# Altium PCB ResistorPatch1.PcbDoc
Units mm, origin at the board's own origin, x right, y up, seen from the top; angles counter-clockwise.
Board outline 99.31 x 19.43 mm, 2 copper layers (Top Layer, Bottom Layer); 43 components, 78 nets, 156 pads, 0 vias.
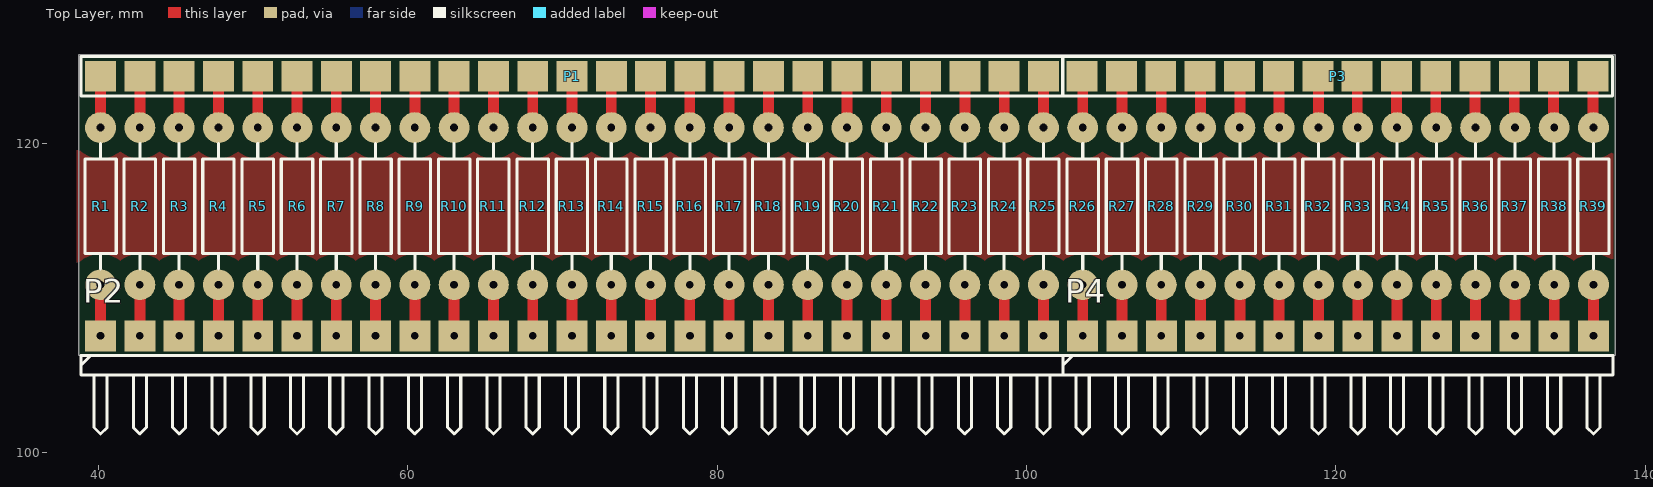
[diagram p0: Top Layer view]
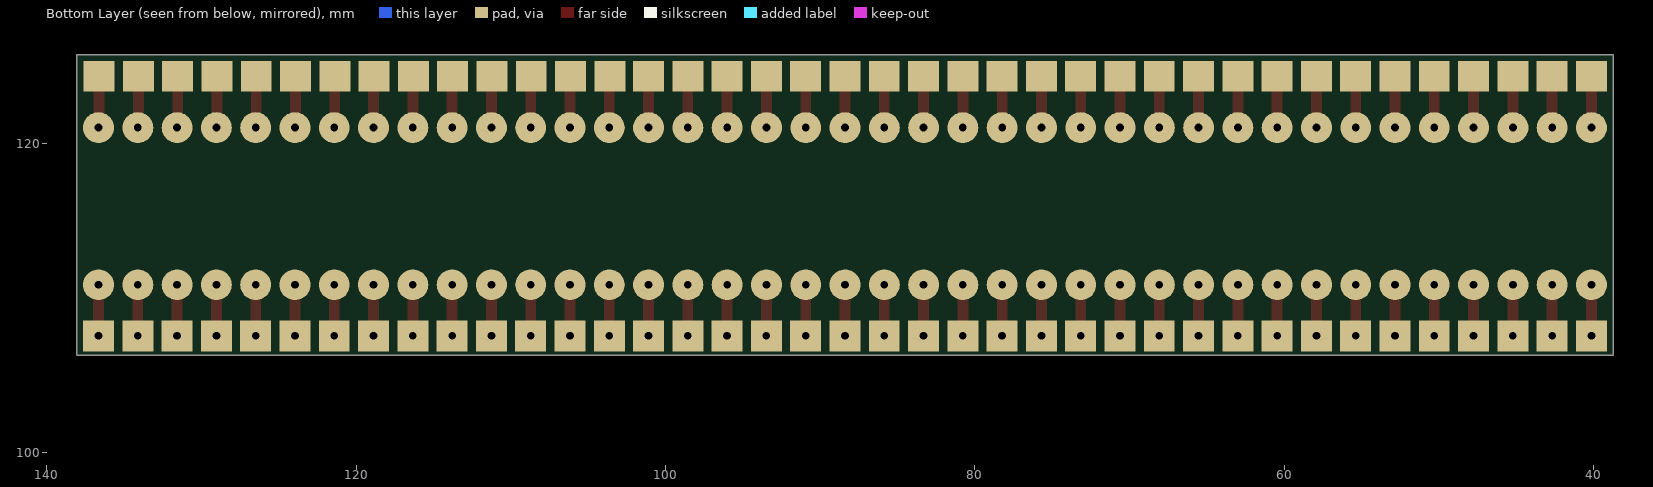
[diagram p1: Bottom Layer view, seen from below]

## Layer stack, top to bottom
Top Solder: solder mask 0.0102, Solder Resist, Dk 3.5
Top Layer: signal copper 0.0356
Dielectric 1: dielectric 0.32, FR-4, Dk 4.8
Bottom Layer: signal copper 0.0356
Bottom Solder: solder mask 0.0102, Solder Resist, Dk 3.5

## Board outline
38.735,106.299 138.049,106.299 138.049,125.73 38.735,125.73

## Design rules (kind name [scope] priority, off if disabled: settings)
Clearance Clearance_1 [InPolygon] p1: gap=1 ignorepadtopadclearanceinfootprint=FALSE
Clearance [All] p2: gap=0.254 ignorepadtopadclearanceinfootprint=FALSE except(0: Arc-Hole Track-Hole SMDPad-Hole THPad-Hole Via-Hole Fill-Hole Poly-Hole Region-Hole Text-Hole)
PolygonConnect [All] p1: connectstyle=Relief reliefconductorwidth=0.254 reliefentries=4 polygonreliefangle="90 Angle" airgapwidth=0.254
RoutingVias [All] p1: holewidth=0.711 width=1.27 viastyle="Through Hole" minholewidth=0.711 minwidth=1.27 maxholewidth=0.711 maxwidth=1.27
SolderMaskExpansion [All] p1: expansion=0.102
Width [All] p1: maxlimit=5 minlimit=0.254 preferedwidth=0.254
30 further rules are at their usual default settings.

## Components (designator, comment, footprint, x,y, rotation, side; value= is the part's Value field where it differs from the comment)
P1 "Header 25" HDR1X25 40.136,124.35 r0 top locked
P2 "Header 25" HDR1X25H 40.136,107.569 r0 top
P3 "Header 14" HDR1X14 103.596,124.35 r0 top locked
P4 "Header 14" HDR1X14H 103.632,107.569 r0 top
R1 "Res1" AXIAL-0.4 40.136,115.951 r270 top value=1k
R2 "Res1" AXIAL-0.4 42.676,115.951 r270 top value=1k
R3 "Res1" AXIAL-0.4 45.212,115.951 r270 top value=1k
R4 "Res1" AXIAL-0.4 47.756,115.951 r270 top value=1k
R5 "Res1" AXIAL-0.4 50.296,115.951 r270 top value=1k
R6 "Res1" AXIAL-0.4 52.836,115.951 r270 top value=1k
R7 "Res1" AXIAL-0.4 55.372,115.951 r270 top value=1k
R8 "Res1" AXIAL-0.4 57.912,115.951 r270 top value=1k
R9 "Res1" AXIAL-0.4 60.452,115.951 r270 top value=1k
R10 "Res1" AXIAL-0.4 62.992,115.951 r270 top value=1k
R11 "Res1" AXIAL-0.4 65.532,115.951 r270 top value=1k
R12 "Res1" AXIAL-0.4 68.072,115.951 r270 top value=1k
R13 "Res1" AXIAL-0.4 70.612,115.951 r270 top value=1k
R14 "Res1" AXIAL-0.4 73.152,115.951 r270 top value=1k
R15 "Res1" AXIAL-0.4 75.692,115.951 r270 top value=1k
R16 "Res1" AXIAL-0.4 78.232,115.951 r270 top value=1k
R17 "Res1" AXIAL-0.4 80.772,115.951 r270 top value=1k
R18 "Res1" AXIAL-0.4 83.312,115.951 r270 top value=1k
R19 "Res1" AXIAL-0.4 85.852,115.951 r270 top value=1k
R20 "Res1" AXIAL-0.4 88.392,115.951 r270 top value=1k
R21 "Res1" AXIAL-0.4 90.932,115.951 r270 top value=1k
R22 "Res1" AXIAL-0.4 93.472,115.951 r270 top value=1k
R23 "Res1" AXIAL-0.4 96.012,115.951 r270 top value=1k
R24 "Res1" AXIAL-0.4 98.556,115.951 r270 top value=1k
R25 "Res1" AXIAL-0.4 101.092,115.951 r270 top value=1k
R26 "Res1" AXIAL-0.4 103.632,115.951 r270 top value=1k
R27 "Res1" AXIAL-0.4 106.172,115.951 r270 top value=1k
R28 "Res1" AXIAL-0.4 108.712,115.951 r270 top value=1k
R29 "Res1" AXIAL-0.4 111.252,115.951 r270 top value=1k
R30 "Res1" AXIAL-0.4 113.792,115.951 r270 top value=1k
R31 "Res1" AXIAL-0.4 116.332,115.951 r270 top value=1k
R32 "Res1" AXIAL-0.4 118.872,115.951 r270 top value=1k
R33 "Res1" AXIAL-0.4 121.412,115.951 r270 top value=1k
R34 "Res1" AXIAL-0.4 123.952,115.951 r270 top value=1k
R35 "Res1" AXIAL-0.4 126.492,115.951 r270 top value=1k
R36 "Res1" AXIAL-0.4 129.032,115.951 r270 top value=1k
R37 "Res1" AXIAL-0.4 131.572,115.951 r270 top value=1k
R38 "Res1" AXIAL-0.4 134.112,115.951 r270 top value=1k
R39 "Res1" AXIAL-0.4 136.652,115.951 r270 top value=1k

## Footprints (in the part's own frame and the unit in brackets; to place one, negate y for a bottom-side part, rotate by r counter-clockwise, add the part's x,y. Pads: shape width x height; smd on the part's side, far side on the other; paste and mask are expansions set on the pad)
AXIAL-0.4 [mm] "Axial Device, Thru-Hole; 2 Leads; 0.4 in Pin Spacing"
  round 2 hole 0.5: 1(-5.08,0) 2(5.08,0)
  silkscreen extent -4.06,-1.02 4.06,1.02
HDR1X14 [mm] "Connector; Header; 14 Position"
  rect 2x2 all layers, no hole: 1(0,0) 2(2.54,0) 3(5.08,0) 4(7.62,0) 5(10.16,0) 6(12.7,0) 7(15.24,0) 8(17.78,0) 9(20.32,0) 10(22.86,0) 11(25.4,0) 12(27.94,0) 13(30.48,0) 14(33.02,0)
  silkscreen extent -1.27,-1.27 34.29,1.27
HDR1X14H [mm] "Connector; Header; 14 Position; Right Angle"
  rect 2x2 hole 0.5: 1(0,0) 2(2.54,0) 3(5.08,0) 4(7.62,0) 5(10.16,0) 6(12.7,0) 7(15.24,0) 8(17.78,0) 9(20.32,0) 10(22.86,0) 11(25.4,0) 12(27.94,0) 13(30.48,0) 14(33.02,0)
  silkscreen extent -1.27,-6.35 34.29,-1.27
HDR1X25 [mm] "Connector; Header; 25 Position"
  rect 2x2 all layers, no hole: 1(0,0) 2(2.54,0) 3(5.08,0) 4(7.62,0) 5(10.16,0) 6(12.7,0) 7(15.24,0) 8(17.78,0) 9(20.32,0) 10(22.86,0) 11(25.4,0) 12(27.94,0) 13(30.48,0) 14(33.02,0) 15(35.56,0) 16(38.1,0) 17(40.64,0) 18(43.18,0) 19(45.72,0) 20(48.26,0) 21(50.8,0) 22(53.34,0) 23(55.88,0) 24(58.42,0) 25(60.96,0)
  silkscreen extent -1.27,-1.27 62.23,1.27
HDR1X25H [mm] "Connector; Header; 25 Position; Right Angle"
  rect 2x2 hole 0.5: 1(0,0) 2(2.54,0) 3(5.08,0) 4(7.62,0) 5(10.16,0) 6(12.7,0) 7(15.24,0) 8(17.78,0) 9(20.32,0) 10(22.86,0) 11(25.4,0) 12(27.94,0) 13(30.48,0) 14(33.02,0) 15(35.56,0) 16(38.1,0) 17(40.64,0) 18(43.18,0) 19(45.72,0) 20(48.26,0) 21(50.8,0) 22(53.34,0) 23(55.88,0) 24(58.42,0) 25(60.96,0)
  silkscreen extent -1.27,-6.35 62.23,-1.27

## Part data
P1 P2: "Header, 25-Pin", LatestRevisionDate=17-Jul-2002, LatestRevisionNote="Re-released for DXP Platform.", Publisher="Altium Limited"
P3 P4: "Header, 14-Pin", LatestRevisionDate=17-Jul-2002, LatestRevisionNote="Re-released for DXP Platform.", Publisher="Altium Limited"
R1 R2 R3 R4 R5 R6 R7 R8 R9 R10 R11 R12 R13 R14 R15 R16 R17 R18 R19 R20 R21 R22 R23 R24 R25 R26 R27 R28 R29 R30 R31 R32 R33 R34 R35 R36 R37 R38 R39: "Resistor", LatestRevisionDate=17-Jul-2002, LatestRevisionNote="Re-released for DXP Platform.", PackageDescription="Axial Device, Thru-Hole; 2 Leads; 0.3 in Pin Spacing", PackageReference=AXIAL-0.3, Published=8-Jun-2000, Publisher="Altium Limited"

## Nets (pads, with @x,y where several pads share a name; then routed paths per layer and width w, separated by ;. In a path a pad name is that pad's centre, name@x,y a point inside that pad or via, vN(x,y) a via of type N, cw(c..) or ccw(c..) an arc to the next point about the centre after c; other vN are vias at no path point)
NetP1_1: P1.1 R1.1 | length 3.3
  Top Layer w0.7: R1.1 P1.1
NetP1_2: P1.2 R2.1 | length 3.3
  Top Layer w0.7: R2.1 P1.2
NetP1_3: P1.3 R3.1 | length 3.3
  Top Layer w0.7: R3.1 45.216,121.035 P1.3
NetP1_4: P1.4 R4.1 | length 3.3
  Top Layer w0.7: R4.1 P1.4
NetP1_5: P1.5 R5.1 | length 3.3
  Top Layer w0.7: R5.1 P1.5
NetP1_6: P1.6 R6.1 | length 3.3
  Top Layer w0.7: R6.1 P1.6
NetP1_7: P1.7 R7.1 | length 3.3
  Top Layer w0.7: R7.1 55.376,121.035 P1.7
NetP1_8: P1.8 R8.1 | length 3.3
  Top Layer w0.7: R8.1 57.916,121.035 P1.8
NetP1_9: P1.9 R9.1 | length 3.3
  Top Layer w0.7: R9.1 60.456,121.035 P1.9
NetP1_10: P1.10 R10.1 | length 3.3
  Top Layer w0.7: R10.1 62.996,121.035 P1.10
NetP1_11: P1.11 R11.1 | length 3.3
  Top Layer w0.7: R11.1 65.536,121.035 P1.11
NetP1_12: P1.12 R12.1 | length 3.3
  Top Layer w0.7: R12.1 68.076,121.035 P1.12
NetP1_13: P1.13 R13.1 | length 3.3
  Top Layer w0.7: R13.1 70.616,121.035 P1.13
NetP1_14: P1.14 R14.1 | length 3.3
  Top Layer w0.7: R14.1 73.152,124.346 P1.14
NetP1_15: P1.15 R15.1 | length 3.3
  Top Layer w0.7: R15.1 75.692,124.346 P1.15
NetP1_16: P1.16 R16.1 | length 3.3
  Top Layer w0.7: R16.1 78.232,124.346 P1.16
NetP1_17: P1.17 R17.1 | length 3.3
  Top Layer w0.7: R17.1 80.772,124.346 P1.17
NetP1_18: P1.18 R18.1 | length 3.3
  Top Layer w0.7: R18.1 83.312,124.346 P1.18
NetP1_19: P1.19 R19.1 | length 3.3
  Top Layer w0.7: R19.1 85.852,124.346 P1.19
NetP1_20: P1.20 R20.1 | length 3.3
  Top Layer w0.7: R20.1 88.392,124.346 P1.20
NetP1_21: P1.21 R21.1 | length 3.3
  Top Layer w0.7: R21.1 90.932,124.346 P1.21
NetP1_22: P1.22 R22.1 | length 3.3
  Top Layer w0.7: R22.1 93.472,124.346 P1.22
NetP1_23: P1.23 R23.1 | length 3.3
  Top Layer w0.7: R23.1 96.012,124.346 P1.23
NetP1_24: P1.24 R24.1 | length 3.3
  Top Layer w0.7: R24.1 P1.24
NetP1_25: P1.25 R25.1 | length 3.3
  Top Layer w0.7: R25.1 101.092,124.346 P1.25
NetP2_1: P2.1 R1.2 | length 3.3
  Top Layer w0.7: P2.1 R1.2
NetP2_2: P2.2 R2.2 | length 3.3
  Top Layer w0.7: P2.2 R2.2
NetP2_3: P2.3 R3.2 | length 3.3
  Top Layer w0.7: R3.2 45.216,110.867 P2.3
NetP2_4: P2.4 R4.2 | length 3.3
  Top Layer w0.7: P2.4 R4.2
NetP2_5: P2.5 R5.2 | length 3.3
  Top Layer w0.7: P2.5 R5.2
NetP2_6: P2.6 R6.2 | length 3.3
  Top Layer w0.7: P2.6 R6.2
NetP2_7: P2.7 R7.2 | length 3.3
  Top Layer w0.7: R7.2 55.376,110.867 P2.7
NetP2_8: P2.8 R8.2 | length 3.3
  Top Layer w0.7: R8.2 57.916,110.867 P2.8
NetP2_9: P2.9 R9.2 | length 3.3
  Top Layer w0.7: R9.2 60.456,110.867 P2.9
NetP2_10: P2.10 R10.2 | length 3.3
  Top Layer w0.7: R10.2 62.996,110.867 P2.10
NetP2_11: P2.11 R11.2 | length 3.3
  Top Layer w0.7: R11.2 65.536,110.867 P2.11
NetP2_12: P2.12 R12.2 | length 3.3
  Top Layer w0.7: R12.2 68.076,110.867 P2.12
NetP2_13: P2.13 R13.2 | length 3.3
  Top Layer w0.7: R13.2 70.616,110.867 P2.13
NetP2_14: P2.14 R14.2 | length 3.3
  Top Layer w0.7: R14.2 73.152,107.573 P2.14
NetP2_15: P2.15 R15.2 | length 3.3
  Top Layer w0.7: R15.2 75.692,107.573 P2.15
NetP2_16: P2.16 R16.2 | length 3.3
  Top Layer w0.7: R16.2 78.232,107.573 P2.16
NetP2_17: P2.17 R17.2 | length 3.3
  Top Layer w0.7: R17.2 80.772,107.573 P2.17
NetP2_18: P2.18 R18.2 | length 3.3
  Top Layer w0.7: R18.2 83.312,107.573 P2.18
NetP2_19: P2.19 R19.2 | length 3.3
  Top Layer w0.7: R19.2 85.852,107.573 P2.19
NetP2_20: P2.20 R20.2 | length 3.3
  Top Layer w0.7: R20.2 88.392,107.573 P2.20
NetP2_21: P2.21 R21.2 | length 3.3
  Top Layer w0.7: R21.2 90.932,107.573 P2.21
NetP2_22: P2.22 R22.2 | length 3.3
  Top Layer w0.7: R22.2 93.472,107.573 P2.22
NetP2_23: P2.23 R23.2 | length 3.3
  Top Layer w0.7: R23.2 96.012,107.573 P2.23
NetP2_24: P2.24 R24.2 | length 3.3
  Top Layer w0.7: P2.24 R24.2
NetP2_25: P2.25 R25.2 | length 3.3
  Top Layer w0.7: R25.2 101.092,107.573 P2.25
NetP3_1: P3.1 R26.1 | length 3.3
  Top Layer w0.7: P3.1 103.632,124.314 R26.1
NetP3_2: P3.2 R27.1 | length 3.3
  Top Layer w0.7: P3.2 106.172,124.314 R27.1
NetP3_3: P3.3 R28.1 | length 3.3
  Top Layer w0.7: P3.3 108.712,124.314 R28.1
NetP3_4: P3.4 R29.1 | length 3.3
  Top Layer w0.7: P3.4 111.252,124.314 R29.1
NetP3_5: P3.5 R30.1 | length 3.3
  Top Layer w0.7: P3.5 113.792,124.314 R30.1
NetP3_6: P3.6 R31.1 | length 3.3
  Top Layer w0.7: P3.6 116.332,124.314 R31.1
NetP3_7: P3.7 R32.1 | length 3.3
  Top Layer w0.7: P3.7 118.872,124.314 R32.1
NetP3_8: P3.8 R33.1 | length 3.3
  Top Layer w0.7: P3.8 121.376,121.067 R33.1
NetP3_9: P3.9 R34.1 | length 3.3
  Top Layer w0.7: P3.9 123.916,121.067 R34.1
NetP3_10: P3.10 R35.1 | length 3.3
  Top Layer w0.7: P3.10 126.456,121.067 R35.1
NetP3_11: P3.11 R36.1 | length 3.3
  Top Layer w0.7: P3.11 128.996,121.067 R36.1
NetP3_12: P3.12 R37.1 | length 3.3
  Top Layer w0.7: P3.12 131.536,121.067 R37.1
NetP3_13: P3.13 R38.1 | length 3.3
  Top Layer w0.7: P3.13 134.076,121.067 R38.1
NetP3_14: P3.14 R39.1 | length 3.3
  Top Layer w0.7: P3.14 136.616,121.067 R39.1
NetP4_1: P4.1 R26.2 | length 3.3
  Top Layer w0.7: P4.1 R26.2
NetP4_2: P4.2 R27.2 | length 3.3
  Top Layer w0.7: P4.2 R27.2
NetP4_3: P4.3 R28.2 | length 3.3
  Top Layer w0.7: P4.3 R28.2
NetP4_4: P4.4 R29.2 | length 3.3
  Top Layer w0.7: P4.4 R29.2
NetP4_5: P4.5 R30.2 | length 3.3
  Top Layer w0.7: P4.5 R30.2
NetP4_6: P4.6 R31.2 | length 3.3
  Top Layer w0.7: P4.6 R31.2
NetP4_7: P4.7 R32.2 | length 3.3
  Top Layer w0.7: P4.7 R32.2
NetP4_8: P4.8 R33.2 | length 3.3
  Top Layer w0.7: P4.8 R33.2
NetP4_9: P4.9 R34.2 | length 3.3
  Top Layer w0.7: P4.9 R34.2
NetP4_10: P4.10 R35.2 | length 3.3
  Top Layer w0.7: P4.10 R35.2
NetP4_11: P4.11 R36.2 | length 3.3
  Top Layer w0.7: P4.11 R36.2
NetP4_12: P4.12 R37.2 | length 3.3
  Top Layer w0.7: P4.12 R37.2
NetP4_13: P4.13 R38.2 | length 3.3
  Top Layer w0.7: P4.13 R38.2
NetP4_14: P4.14 R39.2 | length 3.3
  Top Layer w0.7: P4.14 R39.2

## Polygon pours and split planes (outlines as drawn)
no net on Top Layer "GND" (solid, pour order 4): 38.608,125.984 38.608,106.553 137.922,106.553 137.922,125.984